# EAGLE board And_gate_using_Transister' (EAGLE 9.6.2)
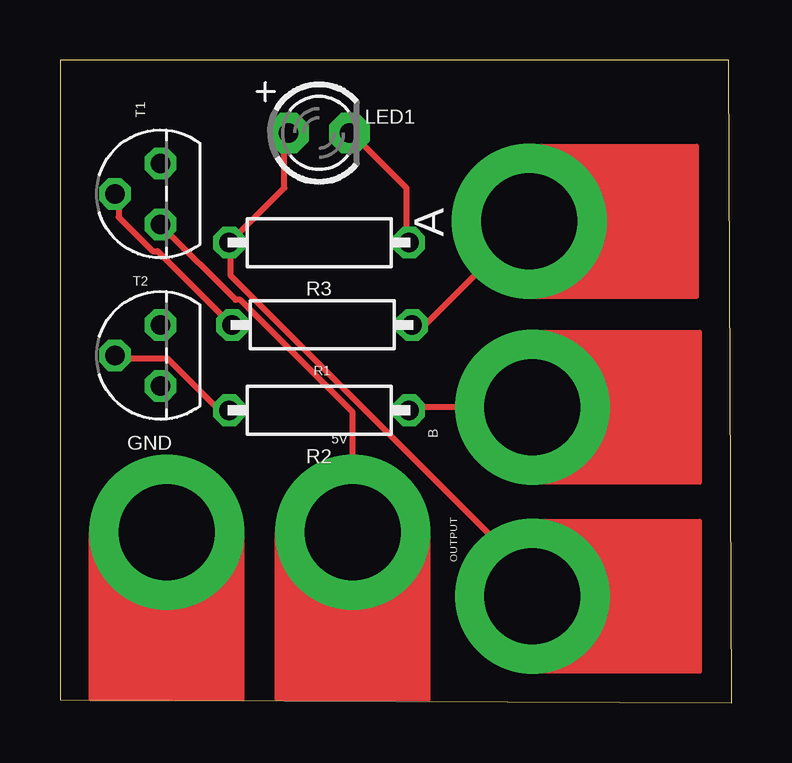
[diagram p0: board, top side]
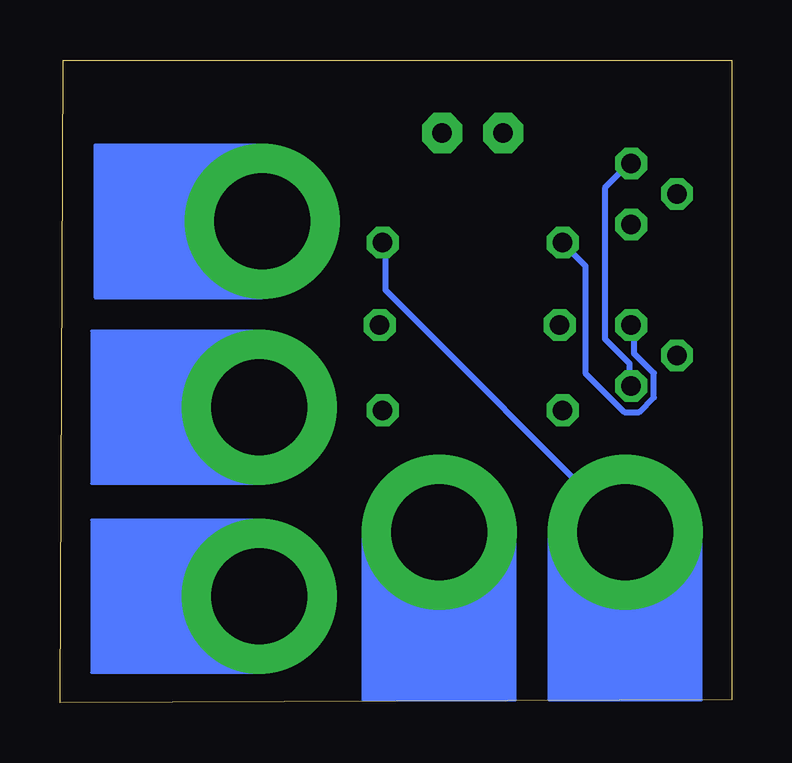
[diagram p1: board, bottom side, seen from below]

Size 27.99 x 26.79 mm. Coordinates in mm from the lower left corner, seen from the top.
Outline: 0,0.13 27.99,0 27.86,26.79 0,26.79 0,0.13
Copper layers (1*16): Top 0.035mm / dielectric 1.5mm / Bottom 0.035mm
Design rules "default *": minimum track width 10mil, minimum drill 0.35mm, track to track 6mil, track to pad 6mil, pad to pad 6mil, via to via 6mil, smd to smd 6mil, copper to edge 40mil, drill to drill 6mil, minimum pad ring 10mil, minimum via ring 8mil, stop-mask expansion 4mil, vias tented up to drill 0mil, thermal gap 10mil

## Footprints (pad centres in the part's own frame; a part is rotated, then mirrored left to right if it is on the bottom)
MICROBIT_PAD = drill 4 pad 6.452: PAD 0,0
LED3MM = drill 0.813 pad 1.676 octagon: A -1.27,0; K 1.27,0
R0207/7 = drill 0.813 octagon: 1 -3.75,0; 2 3.75,0
TO92 = drill 0.813 octagon: 1 1.27,0; 2 0,1.905; 3 -1.27,0

## Placement (x,y rotation side)
5V  MICROBIT_PAD  [MICROBIT_PAD]  12.19,7.11 0 top
A  MICROBIT_PAD  [MICROBIT_PAD]  19.56,20.07 90 top
B  MICROBIT_PAD  [MICROBIT_PAD]  19.68,12.32 90 top
GND  MICROBIT_PAD  [MICROBIT_PAD]  4.45,7.11 0 top
LED1  [LED3MM]  10.79,23.75 0 top
OUTPUT  MICROBIT_PAD  [MICROBIT_PAD]  19.68,4.44 90 top
R1  [R0207/7]  10.92,15.75 180 top
R2  [R0207/7]  10.79,12.19 180 top
R3  [R0207/7]  10.79,19.18 180 top
T1  BC547  [TO92]  4.19,21.21 90 top
T2  BC547  [TO92]  4.19,14.48 90 top

## Library data of the parts
5V A B GND OUTPUT = microbit
LED1 = adafruit
R1-R3 = we-rcl
T1 T2 = transistor-neu-to92

## Nets
5V: 5V.PAD T1.3
GND: GND.PAD LED1.K R3.1
N$1: R2.2 T2.2
N$2: T1.1 T2.3
N$3: LED1.A OUTPUT.PAD R3.2 T2.1
N$4: R1.2 T1.2
N$6: A.PAD R1.1
N$7: B.PAD R2.1

## Tracks (layer width: path | path; a pad name or v marks a point on that pad's centre or on a via)
5V
  Top 0.254: 5V.PAD 12.19,12.12 7.52,16.79 7.32,16.79 4.27,19.84 T1.3
GND
  Top 0.254: R3.1 14.43,19.23 14.43,21.46 12.19,23.7 LED1.K
  Bottom 0.254: R3.1 14.43,19.02 14.43,17.2 4.47,7.24 GND.PAD
N$1
  Top 0.254: R2.2 6.91,12.32 6.5,12.32 4.47,14.35 2.44,14.35 T2.2
N$2
  Bottom 0.254: T2.3 4.27,13.34 4.27,14.15 5.28,15.16 5.28,21.46 4.27,22.48 T1.1
N$3
  Top 0.254: LED1.A 9.35,23.7 9.35,21.46 7.11,19.23 R3.2 7.11,19.02 7.11,17.8 19.51,5.41 19.51,4.6 OUTPUT.PAD
  Bottom 0.254: T2.1 4.06,15.57 4.06,14.55 3.25,13.74 3.25,12.73 3.86,12.12 4.47,12.12 6.1,13.74 6.1,18.21 6.91,19.02 R3.2
N$4
  Top 0.254: R1.2 7.11,15.77 4.06,18.82 3.86,18.82 2.44,20.24 2.44,21.06 T1.2
N$6
  Top 0.254: R1.1 14.83,15.77 15.24,15.77 19.51,20.04 A.PAD
N$7
  Top 0.254: B.PAD 14.63,12.32 R2.1